# EAGLE board DigitalIO_3_3V_LevelShift (EAGLE 7.6.0)
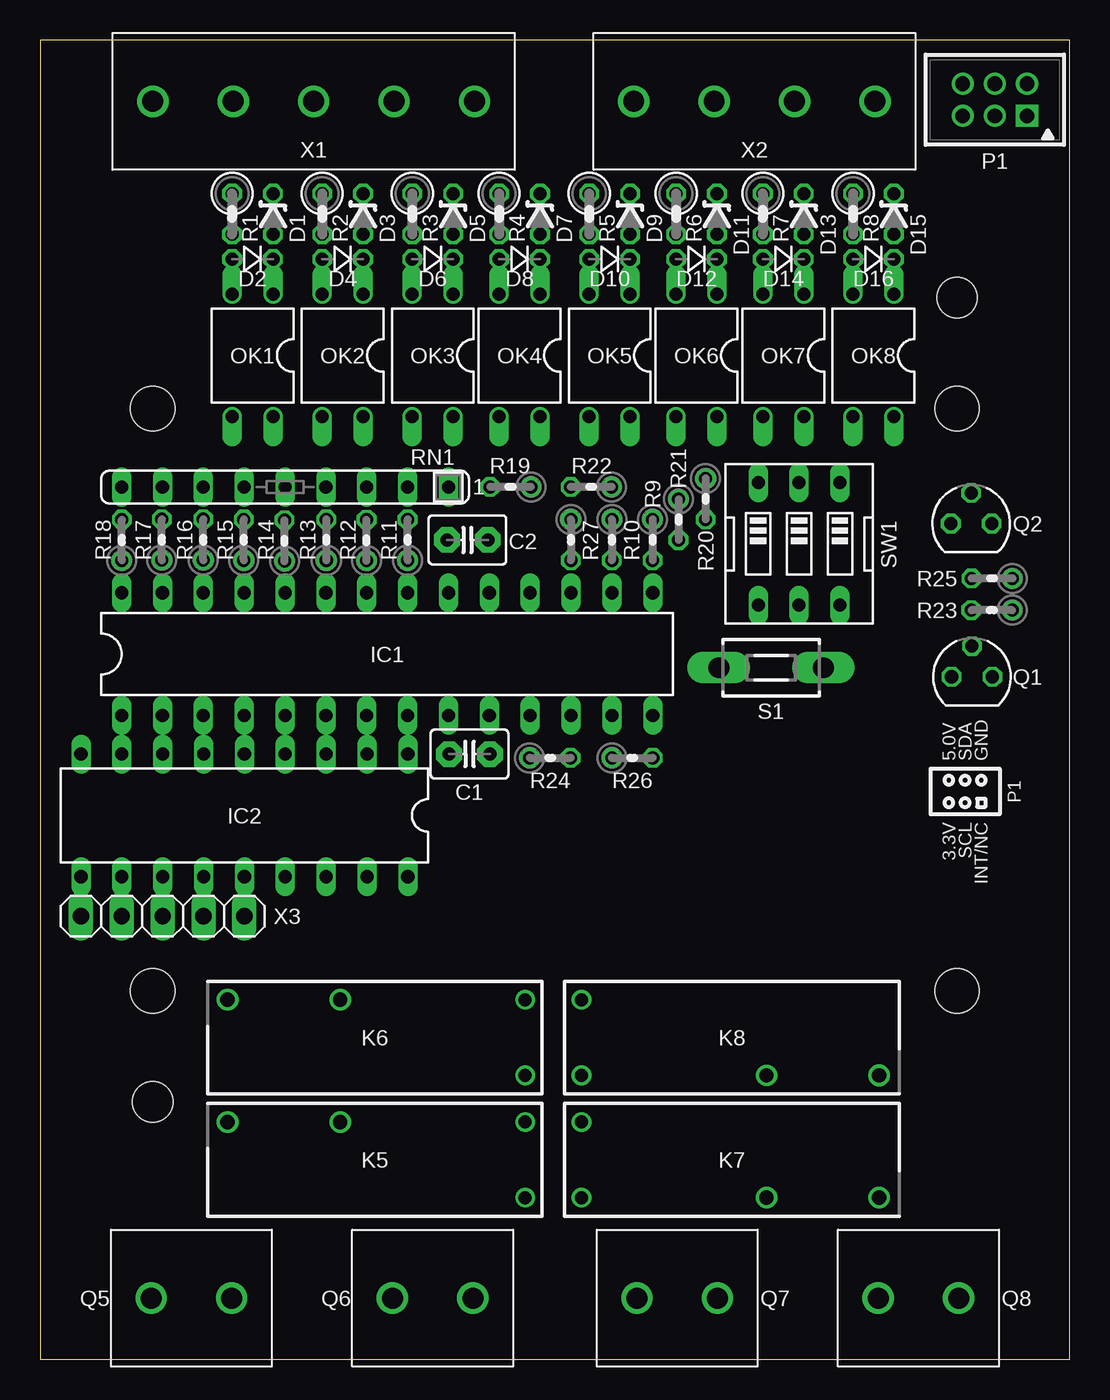
[diagram p0: board, top side]
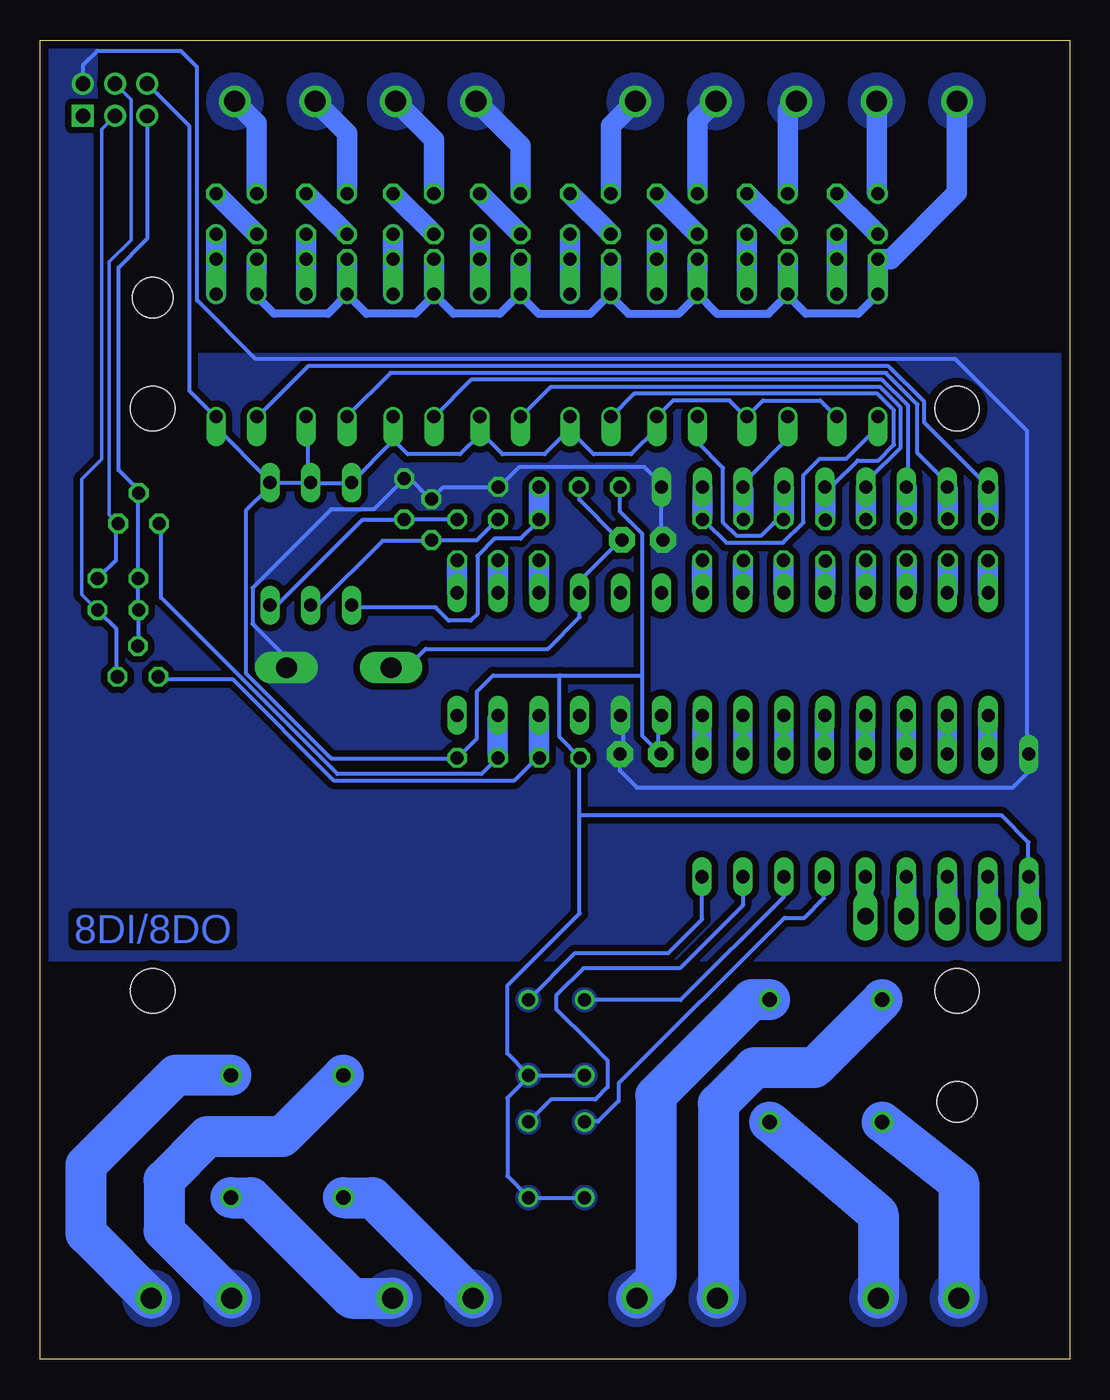
[diagram p1: board, bottom side, seen from below]

Size 64 x 82 mm. Coordinates in mm from the lower left corner, seen from the top.
Outline: 0,0 64,0 64,82 0,82 0,0
Copper layers (1*16): Top 0.035mm / dielectric 1.6mm / Bottom 0.035mm
Design rules "Elecrow": minimum track width 6mil, minimum drill 12mil, track to track 6mil, track to pad 6mil, pad to pad 6mil, via to via 8mil, smd to smd 0mil, copper to edge 20mil, drill to drill 10mil, minimum pad ring 6mil, minimum via ring 6mil, stop-mask expansion 0mil, vias tented up to drill 100mil, thermal gap 10mil
Holes 2.5 mm at 57,66 7,16
Holes 2.75 mm at 57,59.1 57,22.9 7,22.9 7,59.1

## Footprints (pad centres in the part's own frame; a part is rotated, then mirrored left to right if it is on the bottom)
C2.5-3 = drill 0.813 pad 1.6 octagon: 1 -1.27,0; 2 1.27,0
ZDIO-2.5 = drill 0.813 octagon: A 1.27,0; C -1.27,0
DO35-2V = drill 0.813 octagon: A 1.27,0; C -1.27,0
DIL28-3 = drill 0.813 long: 1 -16.51,-3.81; 2 -13.97,-3.81; 3 -11.43,-3.81; 4 -8.89,-3.81; 5 -6.35,-3.81; 6 -3.81,-3.81; 7 -1.27,-3.81; 8 1.27,-3.81; 9 3.81,-3.81; 10 6.35,-3.81; 11 8.89,-3.81; 12 11.43,-3.81; 13 13.97,-3.81; 14 16.51,-3.81; 15 16.51,3.81; 16 13.97,3.81; 17 11.43,3.81; 18 8.89,3.81; 19 6.35,3.81; 20 3.81,3.81; 21 1.27,3.81; 22 -1.27,3.81; 23 -3.81,3.81; 24 -6.35,3.81; 25 -8.89,3.81; 26 -11.43,3.81; 27 -13.97,3.81; 28 -16.51,3.81
DIL18 = drill 0.813 long: 1 -10.16,-3.81; 2 -7.62,-3.81; 3 -5.08,-3.81; 4 -2.54,-3.81; 5 0,-3.81; 6 2.54,-3.81; 7 5.08,-3.81; 8 7.62,-3.81; 9 10.16,-3.81; 10 10.16,3.81; 11 7.62,3.81; 12 5.08,3.81; 13 2.54,3.81; 14 0,3.81; 15 -2.54,3.81; 16 -5.08,3.81; 17 -7.62,3.81; 18 -10.16,3.81
HF46 = drill 0.813: 1 -9.35,2.35; 2 -9.35,-2.35 | drill 0.889: COM 2.15,-2.35 | drill 0.9: NO 9.15,-2.35
DIL04 = drill 0.813 offset: 1 -1.27,-3.81; 2 1.27,-3.81; 3 1.27,3.81; 4 -1.27,3.81
DF11-06DP-2DSA = drill 0.914 square: 1 2,-1 | drill 0.914: 2 2,1; 3 0,-1; 4 0,1; 5 -2,-1; 6 -2,1
SOT54E = drill 0.813 octagon: D -1.27,0; G 0,1.905; S 1.27,0
691131710002 = drill 1.3: 1 -2.5,0; 2 2.5,0
0207/2V = drill 0.813 octagon: 1 -1.27,0; 2 1.27,0
0204V = drill 0.813 octagon: 1 -1.27,0; 2 1.27,0
SIL9 = drill 0.813 long: 1 -10.16,0; 2 -7.62,0; 3 -5.08,0; 4 -2.54,0; 5 0,0; 6 2.54,0; 7 5.08,0; 8 7.62,0; 9 10.16,0
DTS-3 = drill 1.3 long: 1 -3.25,0; 2 3.25,0
EDG-03 = drill 0.813 long: 1 -2.54,-3.81; 2 0,-3.81; 3 2.54,-3.81; 4 2.54,3.81; 5 0,3.81; 6 -2.54,3.81
691131710005 = drill 1.3: 1 -10,0; 2 -5,0; 3 0,0; 4 5,0; 5 10,0
691131710004 = drill 1.3: 1 -7.5,0; 2 -2.5,0; 3 2.5,0; 4 7.5,0
1X05 = drill 1.016 long: 1 -5.08,0; 2 -2.54,0; 3 0,0; 4 2.54,0; 5 5.08,0

## Placement (x,y rotation side)
C1  100nF  [C2.5-3]  26.69,37.62 180 top
C2  100nF  [C2.5-3]  26.56,50.94 0 top
D1  10V  [ZDIO-2.5]  14.47,71.2 270 top
D2  1N4148DO35-2V  [DO35-2V]  13.2,68.4 180 top
D3  10V  [ZDIO-2.5]  20.07,71.2 270 top
D4  1N4148DO35-2V  [DO35-2V]  18.8,68.4 180 top
D5  10V  [ZDIO-2.5]  25.67,71.2 270 top
D6  1N4148DO35-2V  [DO35-2V]  24.4,68.4 180 top
D7  10V  [ZDIO-2.5]  31.07,71.2 270 top
D8  1N4148DO35-2V  [DO35-2V]  29.8,68.4 180 top
D9  10V  [ZDIO-2.5]  36.67,71.2 270 top
D10  1N4148DO35-2V  [DO35-2V]  35.4,68.4 180 top
D11  10V  [ZDIO-2.5]  42.07,71.2 270 top
D12  1N4148DO35-2V  [DO35-2V]  40.8,68.4 180 top
D13  10V  [ZDIO-2.5]  47.47,71.2 270 top
D14  1N4148DO35-2V  [DO35-2V]  46.2,68.4 180 top
D15  10V  [ZDIO-2.5]  53.07,71.2 270 top
D16  1N4148DO35-2V  [DO35-2V]  51.8,68.4 180 top
IC1  MCP23017SP  [DIL28-3]  21.57,43.84 0 top
IC2  ULN2803A  [DIL18]  12.69,33.81 180 top
K5  HF46105  [HF46]  20.8,12.4 180 top
K6  HF46105  [HF46]  20.8,20 180 top
K7  HF46105  [HF46]  43,12.4 0 top
K8  HF46105  [HF46]  43,20 0 top
OK1  PC817  [DIL04]  13.2,62.4 180 top
OK2  PC817  [DIL04]  18.8,62.4 180 top
OK3  PC817  [DIL04]  24.4,62.4 180 top
OK4  PC817  [DIL04]  29.8,62.4 180 top
OK5  PC817  [DIL04]  35.4,62.4 180 top
OK6  PC817  [DIL04]  40.8,62.4 180 top
OK7  PC817  [DIL04]  46.2,62.4 180 top
OK8  PC817  [DIL04]  51.8,62.4 180 top
P1  DF11-06-2DSA  [DF11-06DP-2DSA]  59.35,78.3 0 top
Q1  BS170  [SOT54E]  57.93,42.43 0 top
Q2  BS170  [SOT54E]  57.88,51.95 0 top
Q5  691131710002  [691131710002]  9.4,3.8 0 top
Q6  691131710002  [691131710002]  24.4,3.8 0 top
Q7  691131710002  [691131710002]  39.6,3.8 180 top
Q8  691131710002  [691131710002]  54.6,3.8 180 top
R1  1K2 0.5W  [0207/2V]  11.93,71.2 270 top
R2  1K2 0.5W  [0207/2V]  17.53,71.2 270 top
R3  1K2 0.5W  [0207/2V]  23.13,71.2 270 top
R4  1K2 0.5W  [0207/2V]  28.53,71.2 270 top
R5  1K2 0.5W  [0207/2V]  34.13,71.2 270 top
R6  1K2 0.5W  [0207/2V]  39.53,71.2 270 top
R7  1K2 0.5W  [0207/2V]  44.93,71.2 270 top
R8  1K2 0.5W  [0207/2V]  50.53,71.2 270 top
R9  1K  [0204V]  38.07,50.94 270 top
R10  1K  [0204V]  35.54,50.94 270 top
R11  1K  [0204V]  22.84,50.94 90 top
R12  1K  [0204V]  20.29,50.92 90 top
R13  1K  [0204V]  17.79,50.94 90 top
R14  1K  [0204V]  15.19,50.89 90 top
R15  1K  [0204V]  12.66,50.94 90 top
R16  1K  [0204V]  10.14,50.95 90 top
R17  1K  [0204V]  7.56,50.95 90 top
R18  1K  [0204V]  5.07,50.93 90 top
R19  10K  [0204V]  29.24,54.23 180 top
R20  10K  [0204V]  41.37,53.48 270 top
R21  10K  [0204V]  39.68,52.2 270 top
R22  10K  [0204V]  34.25,54.23 180 top
R23  1K  [0204V]  59.16,46.57 180 top
R24  1K  [0204V]  31.7,37.39 0 top
R25  1K  [0204V]  59.17,48.54 180 top
R26  1K  [0204V]  36.81,37.39 0 top
R27  1K  [0204V]  32.99,50.94 270 top
RN1  10K  [SIL9]  15.22,54.22 180 top
S1  DTS-3  [DTS-3]  45.44,42.99 180 top
SW1  [EDG-03]  47.18,50.69 180 top
X1  691131710005  [691131710005]  17,78.2 0 top
X2  691131710004  [691131710004]  44.4,78.2 0 top
X3  [1X05]  7.61,27.55 0 top

## Library data of the parts
C1 C2 = capacitor-wima; MF: MULTICOMP; MPN: MCRR50104X7RK0050; OC_FARNELL: 1216440
D1-D16 = diode; OC_FARNELL: unknown
IC1 = microchip; MF: MICROCHIP; MPN: MCP23017-E/SP; OC_FARNELL: 1332088; OC_NEWARK: 31K2959
IC2 = uln-udn; MF: STMICROELECTRONICS; MPN: ULN2803A; OC_FARNELL: 1094428
K5-K8 = hongfa; OC_FARNELL: unknown; OC_NEWARK: unknown
OK1-OK8 = optocoupler; MF: SHARP; MPN: PC817X4J000F; OC_FARNELL: 9707727; OC_NEWARK: 97K7059
P1 = con-hirose-df11; OC_FARNELL: unknown
Q1 Q2 = transistor-small-signal; MF: ON SEMICONDUCTOR; MPN: BS170G; OC_FARNELL: 9556192
Q5-Q8 X1 X2 = con-wuerth; OC_FARNELL: unknown
R1-R8 = resistor; MF: MULTICOMP; MPN: MCF 0.25W 1K2; OC_FARNELL: 9339124
R9-R22 R27 = resistor; OC_FARNELL: unknown
R23-R26 = rcl; OC_FARNELL: unknown
RN1 = resistor-sil; OC_FARNELL: unknown; OC_NEWARK: unknown
S1 = switch-tact; OC_FARNELL: unknown
SW1 = special; OC_FARNELL: unknown
X3 = pinhead

## Nets
+3V3: P1.5 Q1.G Q2.G R23.2 R25.2
+5V: C1.2 IC1.9 IC2.10 K5.1 K6.1 K7.2 K8.2 OK1.4 OK2.4 OK3.4 OK4.4 OK5.4 OK6.4 OK7.4 OK8.4 P1.6 R19.2 R24.1 R26.2 SW1.1 SW1.2 SW1.3 X3.1
GND: C1.1 C2.1 IC1.10 IC2.9 P1.2 R20.1 R21.1 R22.1 RN1.1 S1.1
N$1: IC1.8 IC2.1
N$2: IC1.7 IC2.2
N$3: IC1.6 IC2.3
N$4: IC1.5 IC2.4
N$5: IC1.4 IC2.5
N$6: IC1.3 IC2.6
N$7: IC1.2 IC2.7
N$8: IC1.1 IC2.8
N$9: D3.C R2.2
N$10: D1.C R1.2
N$11: D2.A D4.A D6.A D8.A D10.A D12.A D14.A D16.A OK1.2 OK2.2 OK3.2 OK4.2 OK5.2 OK6.2 OK7.2 OK8.2 X1.1
N$12: D1.A D2.C OK1.1
N$13: R6.1 X2.2
N$14: R2.1 X1.3
N$15: OK1.3 R11.2 RN1.2
N$16: R3.1 X1.4
N$17: R7.1 X2.3
N$18: R1.1 X1.2
N$19: D3.A D4.C OK2.1
N$20: OK2.3 R12.2 RN1.3
N$21: D5.C R3.2
N$22: R4.1 X1.5
N$23: D5.A D6.C OK3.1
N$24: R5.1 X2.1
N$25: OK3.3 R13.2 RN1.4
N$26: R8.1 X2.4
N$27: D7.C R4.2
N$28: IC2.14 X3.5
N$29: D7.A D8.C OK4.1
N$30: IC2.13 X3.4
N$31: OK4.3 R14.2 RN1.5
N$32: IC2.12 X3.3
N$33: D9.C R5.2
N$34: IC2.11 X3.2
N$35: D9.A D10.C OK5.1
N$36: R22.2 R27.1 SW1.4
N$37: OK5.3 R15.2 RN1.6
N$38: K8.NO Q8.1
N$39: D11.C R6.2
N$40: K8.COM Q8.2
N$41: D11.A D12.C OK6.1
N$42: IC2.15 K5.2
N$43: OK6.3 R16.2 RN1.7
N$44: K7.NO Q7.1
N$45: D13.C R7.2
N$46: K7.COM Q7.2
N$47: D13.A D14.C OK7.1
N$48: IC2.16 K6.2
N$49: OK7.3 R17.2 RN1.8
N$50: IC1.15 R9.2
N$51: D15.C R8.2
N$52: IC1.16 R10.2
N$53: D15.A D16.C OK8.1
N$54: IC2.17 K7.1
N$55: OK8.3 R18.2 RN1.9
N$56: IC2.18 K8.1
N$57: C2.2 IC1.18 R19.1 S1.2
N$58: IC1.12 Q1.D R24.2
N$59: IC1.21 R11.1
N$60: IC1.22 R12.1
N$61: IC1.13 Q2.D R26.1
N$62: IC1.23 R13.1
N$63: IC1.28 R18.1
N$64: IC1.27 R17.1
N$65: IC1.26 R16.1
N$66: K5.NO Q5.1
N$67: IC1.25 R15.1
N$68: IC1.24 R14.1
N$69: P1.4 Q2.S R25.1
N$71: P1.3 Q1.S R23.1
N$75: K5.COM Q5.2
N$77: R9.1 R20.2 SW1.6
N$78: R10.1 R21.2 SW1.5
N$79: IC1.17 R27.2
N$88: K6.NO Q6.1
N$89: K6.COM Q6.2

## Tracks (layer width: path | path; a pad name or v marks a point on that pad's centre or on a via)
+3V3
  Bottom 0.254: Q1.G 57.91,44.5 57.91,46.53 R23.2 57.91,46.74 57.91,48.36 R25.2 57.91,48.56 57.91,53.85 Q2.G 57.91,54.05 59.13,55.27 59.13,67.87 57.51,69.49 57.35,69.65 P1.5
+5V
  Bottom 0.203: IC1.9 25.45,40.08 25.44,40.04
  Bottom 0.254: 25.56,39.99 25.56,38.09 25.6,38 25.56,37.88 25.56,37.76 C1.2 26.56,38.76 26.56,42.53 | K8.2 33.73,17.47 34.96,16.24 34.96,11.39 33.73,10.16 K7.2 K5.1 | SW1.2 47.14,54.46 44.7,54.46 SW1.3 44.56,54.6 42.08,57.08 OK6.4 41.96,57.04 41.84,56.95 41.15,56.26 37.89,56.26 36.67,57.48 OK5.4 36.69,57.69 35.26,56.26 32.64,56.26 31.09,57.81 OK4.4 31.06,57.73 29.59,56.26 27.26,56.26 25.67,57.85 OK3.4 | SW1.1 49.58,54.46 47.35,54.46 SW1.2 | OK7.4 47.35,58.52 47.35,54.66 SW1.2 | OK1.4 14.47,58.57 15.5,59.6 19.06,59.6 OK2.4 20.18,58.64 21.14,59.6 24.66,59.6 OK3.4 | OK3.4 | 25.6,40.03 25.56,39.99 | 25.81,58.52 OK3.4 | IC1.9 25.44,40.04 25.56,39.99 | SW1.1 49.78,54.66 53.03,57.91 53.03,58.52 OK8.4 53.24,58.73 54.71,60.2 54.71,76.65 P1.6 57.3,79.25 P1.6 | 49.78,54.46 SW1.1 | R24.1 | 30.47,33.79 30.47,27.72 34.96,23.23 34.96,19.01 33.72,17.77 K8.2 | IC2.10 2.56,30.74 2.56,32.14 4.23,33.81 30.45,33.81 30.47,33.79 | 49.84,54.34 SW1.1 | 30.47,33.79 30.47,37.39 R24.1 | 49.78,54.25 SW1.1 | 26.56,42.53 26.56,51.31 27.96,52.71 R19.2 | SW1.1 49.84,54.14 51.22,52.76 51.22,42.67 45.9,37.35 38.14,37.35 R26.2 38.01,37.42 36.86,38.57 36.86,41.49 35.84,42.51 31.71,42.51 | 31.71,42.51 26.58,42.51 26.56,42.53 | R24.1 31.71,38.67 31.71,42.51 | K8.2 K6.1
  Bottom 1.016: X3.1 2.54,27.26
  Bottom 1.27: 2.54,27.26 IC2.10
  pour Bottom (no thermals): 29.67,9.58 arc180 30.63,10.52 arc180
  pour Bottom (no thermals): 33.17,9.58 arc180 34.13,10.52 arc180
  pour Bottom (no thermals): 33.17,17.18 arc180 34.13,18.12 arc180
  pour Bottom (no thermals): 29.67,17.18 arc180 30.63,18.12 arc180
GND
  Bottom 0.254: 28,37.59 27.98,37.76 | 27.74,40.02 27.74,37.67 C1.1 27.96,36.59 26.91,35.54 24.28,35.54 | 27.74,40.02 27.74,40.37 | 24.28,35.54 3.54,35.54 2.53,36.55 IC2.9 2.64,37.8 2.64,57.71 7.11,62.18 50.6,62.18 54.25,65.84 54.25,80.33 55.25,81.32 60.46,81.32 61.35,80.43 P1.2 | 27.74,40.02 IC1.10 | S1.1 48.77,43.08 48.77,43.69 50.8,45.72 50.8,47.95 45.92,52.83 43.28,52.83 41.45,54.66 R20.1 41.02,54.74 39.8,53.52 R21.1 38.94,54.22 R22.1 35.4,54.28 34.19,55.49 26.46,55.49 25.35,54.38 25.5,54.26 RN1.1 25.38,50.98 C2.1 25.38,50.82 | 24.06,35.53 24.28,35.54
  Bottom 0.508: 27.97,37.84 C1.1
  Bottom 1.016: 27.97,37.84 27.98,37.76
  pour Bottom (isolate 0.406, no thermals): 0,62.5 64,62.5 64,24.8 0,24.8
  pour Bottom (isolate 0.406, no thermals): 60.5,82 64,82 64,24.8 29.5,24.8 29.5,62.5 60.5,62.5
N$1
  Bottom 0.508: 22.86,40.34 IC1.8
  Bottom 1.2: 22.86,40.34 IC2.1
N$2
  Bottom 0.508: 20.32,40.35 IC1.7
  Bottom 1.2: 20.32,40.35 IC2.2
N$3
  Bottom 0.508: 17.77,40.4 IC1.6
  Bottom 1.2: 17.77,40.4 IC2.3
N$4
  Bottom 0.508: 15.23,40.35 IC1.5
  Bottom 1.2: 15.23,40.35 IC2.4
N$5
  Bottom 0.508: 12.7,40.24 IC1.4
  Bottom 1.2: 12.7,40.24 IC2.5
N$6
  Bottom 0.508: 10.15,40.53 IC1.3
  Bottom 1.2: 10.15,40.53 IC2.6
N$7
  Bottom 0.508: 7.62,40.6 IC1.2
  Bottom 1.2: 7.62,40.6 IC2.7
N$8
  Bottom 0.508: 5.08,40.37 IC1.1
  Bottom 1.2: 5.08,40.37 IC2.8
N$9
  Bottom 1.27: R2.2 D3.C
N$10
  Bottom 1.27: R1.2 D1.C
N$11
  Bottom 0.508: 12.2,66.2 OK1.2 13.14,65 16.4,65 17.56,66.16 OK2.2 17.54,66.14 17.57,66.14 18.71,65 21.91,65 23.11,66.2 | 23.11,66.2 23.1,66.19 24.29,65 27.43,65 28.58,66.15 OK4.2 28.57,66.22 29.79,65 33.01,65 34.19,66.18 | 23.11,66.2 OK3.2 | 34.19,66.18 OK5.2 | 34.19,66.18 34.24,66.23 34.23,66.19 35.41,65 38.3,65 39.39,66.08 39.62,66.14 OK6.2 39.57,66.09 40.66,65 43.72,65 OK7.2 44.91,66.2 46.11,65 49.45,65 50.5,66.05 50.6,66.11 OK8.2
  Bottom 1.27: OK1.2 D2.A 11.13,68.4 7.01,72.52 X1.1 | D4.A OK2.2 | D6.A OK3.2 | D8.A OK4.2 | D10.A OK5.2 | D12.A OK6.2 | D16.A OK8.2 | D14.A OK7.2
  pour Bottom (no thermals): 5.9,77 arc180 8.1,79.4 arc180
N$12
  Bottom 1.27: D1.A D2.C OK1.1
N$13
  Bottom 1.27: R6.1 39.53,75.83 X2.2
  pour Bottom (no thermals): 40.8,77 arc180 43,79.4 arc180
N$14
  Bottom 1.27: R2.1 17.53,77.67 X1.3
  pour Bottom (no thermals): 15.9,77 arc180 18.1,79.4 arc180
N$15
  Bottom 0.254: OK1.3 11.95,57.93 13.89,55.99 15.54,55.99 16.55,54.98 16.55,52.03 17.82,50.76 21.34,50.76 22.64,52.06 R11.2
  Bottom 0.508: 22.84,52.3 R11.2 | 22.84,54.17 RN1.2
  Bottom 1.27: 22.84,54.17 22.84,52.3
N$16
  Bottom 1.27: R3.1 23.13,77.07 X1.4
  pour Bottom (no thermals): 20.9,77 arc180 23.1,79.4 arc180
N$17
  Bottom 1.27: R7.1 44.93,76.23 X2.3
  pour Bottom (no thermals): 45.8,77 arc180 48,79.4 arc180
N$18
  Bottom 1.27: X1.2 12,72.54 R1.1
  pour Bottom (no thermals): 10.9,77 arc180 13.1,79.4 arc180
N$19
  Bottom 1.27: OK2.1 D4.C D3.A
N$20
  Bottom 0.254: OK2.3 17.54,57.22 20.06,54.7 RN1.3 20.32,54.05 20.29,54.05 | 20.29,52.27 20.32,52.22 R12.2
  Bottom 1.2: 20.29,54.1 20.29,54.05
  Bottom 1.27: 20.29,54.05 20.29,52.27
N$21
  Bottom 1.27: R3.2 D5.C
N$22
  Bottom 1.27: R4.1 28.53,76.67 X1.5
  pour Bottom (no thermals): 25.9,77 arc180 28.1,79.4 arc180
N$23
  Bottom 1.27: OK3.1 D6.C D5.A
N$24
  Bottom 1.27: R5.1 34.13,75.43 X2.1
  pour Bottom (no thermals): 35.8,77 arc180 38,79.4 arc180
N$25
  Bottom 0.254: OK3.3 23.14,57.94 23.14,57.01 21.54,55.41 21.54,52.02 20.7,51.18 19.2,51.18 18.36,52.02 R13.2
  Bottom 0.508: 23.2,58.4 OK3.3 23.2,58.2 | 17.77,52.28 R13.2 | 17.77,54.16 RN1.4
  Bottom 1.27: 17.77,54.16 17.77,52.28
N$26
  Bottom 1.27: R8.1 50.53,76.83 X2.4
  pour Bottom (no thermals): 50.8,77 arc180 53,79.4 arc180
N$27
  Bottom 1.27: R4.2 D7.C
N$28
  Bottom 1.016: X3.5 12.7,27.26 IC2.14
N$29
  Bottom 1.27: OK4.1 D8.C D7.A
N$30
  Bottom 1.016: X3.4 10.15,27.26
  Bottom 1.27: 10.15,27.26 IC2.13
N$31
  Bottom 0.254: OK4.3 28.28,58.68 28.53,58.57 27.08,60.02 11.94,60.02 10.92,59 10.92,56.86 11.9,55.88 13.18,55.88 14.62,54.44 RN1.5
  Bottom 0.508: 28.54,57.92 OK4.3 | 15.2,52.3 R14.2 | 15.2,54.17 RN1.5
  Bottom 1.27: 15.2,54.17 15.2,52.3
N$32
  Bottom 1.016: X3.3 7.62,27.26
  Bottom 1.27: 7.62,27.26 IC2.12
N$33
  Bottom 1.27: R5.2 D9.C
N$34
  Bottom 1.016: X3.2 5.08,27.26
  Bottom 1.27: 5.08,27.26 IC2.11
N$35
  Bottom 1.27: OK5.1 D10.C D9.A
N$36
  Bottom 0.254: R27.1 33.12,52.02 34.12,51.02 35.75,51.02 36.83,49.94 36.83,46.34 37.24,45.92 38.61,45.92 39.42,46.74 44.5,46.74 SW1.4
  Bottom 1.27: R22.2 R27.1
N$37
  Bottom 0.254: OK5.3 34.11,58.59 32.26,60.44 11.78,60.44 10.5,59.16 10.5,56.68 12.44,54.74 RN1.6
  Bottom 0.508: 12.68,52.27 R15.2 | 12.68,54.15 RN1.6
  Bottom 1.27: 12.68,54.15 12.68,52.27
N$38
  Bottom 2.54: Q8.1 57.13,3.8 61.12,7.79 61.16,7.83 61.16,12.06 55.57,17.65 K8.NO
  pour Bottom (no thermals): 56,2.6 arc180 58.2,5 arc180
N$39
  Bottom 1.27: R6.2 D11.C
N$40
  Bottom 2.54: K8.COM 48.97,13.83 53.61,13.83 56.3,11.14 56.3,8 Q8.2
  pour Bottom (no thermals): 51,2.6 arc180 53.2,5 arc180
N$41
  Bottom 1.27: OK6.1 D12.C D11.A
N$42
  Bottom 0.254: 30.15,14.78 K5.2 30.12,14.78 29.32,14.78 28.04,16.06 28.04,17.14 17.73,27.45 16.5,27.45 15.27,28.68 15.27,29.96 IC2.15
  pour Bottom (no thermals): 29.67,14.28 arc180 30.63,15.22 arc180
N$43
  Bottom 0.254: OK6.3 39.16,58.72 39.53,58.57 37.2,60.9 11.66,60.9 10.04,59.28 10.04,54.74 RN1.7
  Bottom 0.508: 39.4,58.6 OK6.3 | 10.13,52.27 R16.2 | 10.13,54.15 RN1.7
  Bottom 1.27: 10.13,54.15 10.13,52.27
N$44
  Bottom 2.54: K7.NO 50.89,10.05 44.64,3.8 Q7.1
  pour Bottom (no thermals): 41,2.6 arc180 43.2,5 arc180
N$45
  Bottom 1.27: R7.2 D13.C
N$46
  Bottom 2.54: K7.COM 43.35,10.05 Q7.2
  pour Bottom (no thermals): 36,2.6 arc180 38.2,5 arc180
N$47
  Bottom 1.27: OK7.1 D14.C D13.A
N$48
  Bottom 0.254: IC2.16 17.77,28.75 24.19,22.34 K6.2
  pour Bottom (no thermals): 29.67,21.88 arc180 30.63,22.82 arc180
N$49
  Bottom 0.254: OK7.3 44.92,58.62 42.22,61.32 11.42,61.32 9.46,59.36 9.46,56.34 7.82,54.7 RN1.8
  Bottom 0.508: 7.58,52.23 R17.2 | 7.58,54.1 RN1.8
  Bottom 1.27: 7.58,54.1 7.58,52.23
N$50
  Bottom 0.254: R9.2
  Bottom 1.27: R9.2 IC1.15
N$51
  Bottom 1.27: R8.2 D15.C
N$52
  Bottom 1.27: R10.2 IC1.16
N$53
  Bottom 1.27: OK8.1 D16.C D15.A
N$54
  Bottom 0.254: K7.1 33.63,14.75 32.23,16.15 29.49,16.15 28.72,16.92 28.72,18.58 29.86,19.72 31.92,21.78 31.92,22.61 30.23,24.3 24.24,24.3 20.32,28.23 IC2.17
  pour Bottom (no thermals): 33.17,14.28 arc180 34.13,15.22 arc180
N$55
  Bottom 0.254: RN1.9 5.46,54.66 9.04,58.24 9.04,59.52 11.26,61.74 47.36,61.74 50.56,58.54 OK8.3 | R18.2 5.08,52.22 5.06,52.38
  Bottom 1.27: RN1.9 5.06,52.38
N$56
  Bottom 0.254: K8.1 30.74,25.26 28.11,25.26 24.95,25.26 22.86,27.35 IC2.18
  pour Bottom (no thermals): 33.17,21.88 arc180 34.13,22.82 arc180
N$57
  Bottom 0.254: R19.1 30.48,54.05 30.48,53.44 28.04,51 C2.2 28.04,50.8 30.28,48.56 30.28,47.75 IC1.18 | 30.48,47.55 IC1.18 | S1.2 41.21,42.99 40.04,44.16 32.44,44.16 30.47,46.13 IC1.18
N$58
  Bottom 0.254: 33,37.64 R24.2 | 33,39.88 IC1.12 | 32.92,37.39 R24.2 | Q1.D 56.49,42.27 52.02,42.27 45.72,35.97 34.54,35.97 33.12,37.39 R24.2
  Bottom 1.27: 33,39.88 33,37.64
N$59
  Bottom 0.254: IC1.21 22.96,47.75 22.86,47.75
  Bottom 0.508: 22.86,49.51 R11.1
  Bottom 1.2: 22.86,47.75 22.86,47.63
  Bottom 1.27: 22.86,49.51 22.86,47.75
N$60
  Bottom 0.508: IC1.22 | 20.3,49.53 R12.1
  Bottom 1.27: 20.3,49.53 IC1.22
N$61
  Bottom 0.254: 35.56,37.57 R26.1 35.56,37.39 36.58,36.37 45.52,36.37 56.49,47.35 56.49,51.82 Q2.D | 35.56,39.81 IC1.13
  Bottom 1.27: 35.56,39.81 35.56,37.57
N$62
  Bottom 0.508: 17.8,47.67 IC1.23 | 17.8,49.55 R13.1
  Bottom 1.27: 17.8,49.55 17.8,47.67
N$63
  Bottom 0.508: 5.08,47.66 IC1.28 | 5.08,49.53 R18.1
  Bottom 1.27: 5.08,49.53 5.08,47.66
N$64
  Bottom 0.508: 7.58,47.71 IC1.27 | 7.58,49.59 R17.1
  Bottom 1.27: 7.58,49.59 7.58,47.71
N$65
  Bottom 0.508: 10.12,47.75 IC1.26 | 10.12,49.62 R16.1
  Bottom 1.27: 10.12,49.62 10.12,47.75
N$66
  Bottom 2.54: K5.NO 6.9,11 Q5.1
  pour Bottom (no thermals): 5.8,2.6 arc180 8,5 arc180
N$67
  Bottom 0.508: 12.68,47.67 IC1.25 | 12.68,49.55 R15.1
  Bottom 1.27: 12.68,49.55 12.68,47.67
N$68
  Bottom 0.508: 15.2,47.73 IC1.24 | 15.2,49.48 R14.1
  Bottom 1.27: 15.2,49.48 15.2,47.73
N$69
  Bottom 0.203: 59.28,51.82 Q2.S 59.25,52.02 59.7,52.47 59.7,68.23 58.35,69.58 58.35,78.3 P1.4 | 60.35,48.62 R25.1
  Bottom 0.254: 59.28,51.82 59.28,49.68 60.35,48.62
N$71
  Bottom 0.203: P1.3 60.18,76.48 60.18,56 60.2,55.93 61.42,54.71 61.42,47.54 60.71,46.83 60.5,46.63 R23.1 60.35,46.48 | 59.28,42.52 Q1.S
  Bottom 0.254: 59.28,42.52 59.28,45.41 60.35,46.48
N$75
  Bottom 2.54: K5.COM 11.9,9 Q5.2
  pour Bottom (no thermals): 10.8,2.6 arc180 13,5 arc180
N$77
  Bottom 0.254: R9.1 R20.2 41.48,52.16 43.98,52.16 49.26,46.88 SW1.6
N$78
  Bottom 0.254: R10.1 35.57,52.2 36.83,50.94 R21.2 39.8,50.88 42.72,50.88 46.72,46.88 SW1.5
N$79
  Bottom 0.254: R27.2
  Bottom 1.27: R27.2 IC1.17
N$88
  Bottom 2.54: K6.NO 15.88,18.12 17.48,18.12 19.61,18.12 21.85,15.88 21.85,3.85 Q6.1
  pour Bottom (no thermals): 20.8,2.6 arc180 23,5 arc180
N$89
  Bottom 2.54: K6.COM 19.78,22.35 25.73,16.4 25.73,4.97 Q6.2
  pour Bottom (no thermals): 25.8,2.6 arc180 28,5 arc180

## Text on the board
Bottom: 8DI/8DO
tNames: 5.0V | SDA | GND | P1 | 3.3V | SCL | INT/NC